# Altium PCB 高级控制盒IJM区组合.PcbDoc
Units mil, origin at the board's own origin, x right, y up, seen from the top; angles counter-clockwise.
Board outline 17086.62 x 944.88 mil, 2 copper layers (Top Layer, Bottom Layer); 8 components, 8 nets, 34 pads, 3 vias.
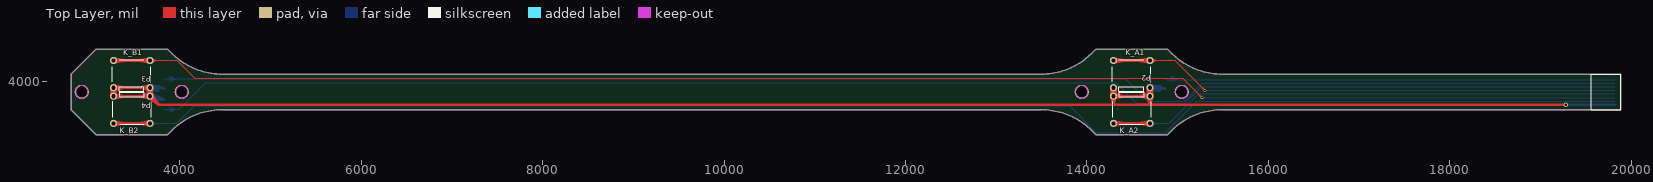
[diagram p0: Top Layer view]
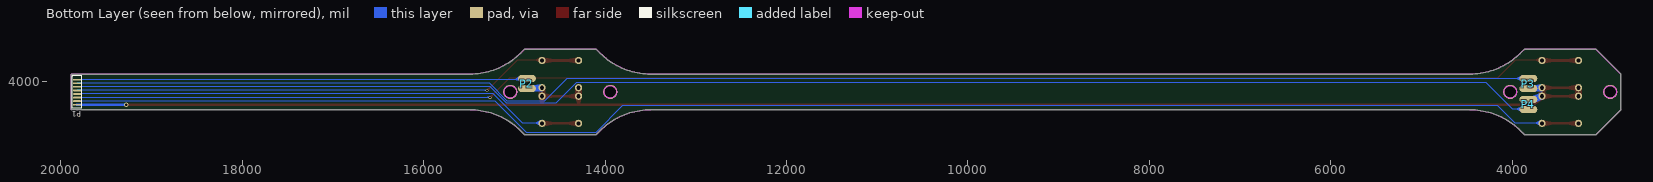
[diagram p1: Bottom Layer view, seen from below]
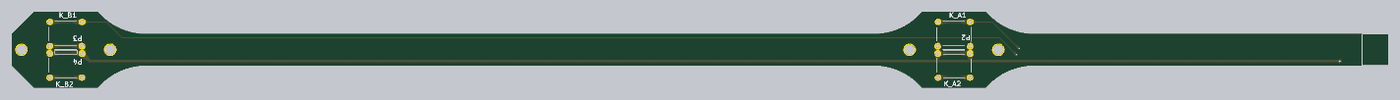
[diagram p2: 3D render of the assembled board from above, using the file's embedded part models]

## Layer stack, top to bottom
Top Layer: signal copper 1.4
Dielectric: dielectric 12.6, FR-4, Dk 4.8
Bottom Layer: signal copper 1.4

## Board outline
3075.38,3410.55 3862.78,3410.55 3907.74,3455.52 cw(c4464.52,2898.74) 4464.52,3686.14 13497.26,3686.14 cw(c13497.26,2898.74) 14054.04,3455.52 14099,3410.55 14886.41,3410.55 14931.37,3455.52 cw(c15488.15,2898.74) 15488.15,3686.14 19886.41,3686.14 19886.41,4079.84 15488.15,4079.84 cw(c15488.15,4867.24) 14931.37,4310.47 14886.41,4355.43 14099,4355.43 14054.04,4310.47 cw(c13497.26,4867.24) 13497.26,4079.84 4464.52,4079.84 cw(c4464.52,4867.24) 3907.74,4310.47 3862.78,4355.43 3075.38,4355.43 2799.78,4079.84 2799.78,3686.14

## Design rules (kind name [scope] priority, off if disabled: settings)
Clearance [All] p1: gap=10
PolygonConnect [All] p1: connectstyle=Relief reliefconductorwidth=10 reliefentries=4 polygonreliefangle="90 Angle"
RoutingVias [All] p1: holewidth=28 width=50 viastyle="Through Hole" minholewidth=28 minwidth=50 maxholewidth=28 maxwidth=50
SilkscreenOverComponentPads [All] p1: minsilkscreentomaskgap=10
SolderMaskExpansion [All] p1: expansion=4
Width [All] p1: maxlimit=50 minlimit=10 preferedwidth=10
27 further rules are at their usual default settings.

## Components (designator, comment, footprint, x,y, rotation, side; value= is the part's Value field where it differs from the comment)
K_A1 "SW4" SW-YKg 14492.7,4079.84 r180 top locked
K_A2 "SW4" SW-YKg 14492.7,3686.14 r0 top locked
K_B1 "SW4" SW-YKg 3469.08,4079.84 r180 top locked
K_B2 "SW4" SW-YKg 3469.08,3686.14 r0 top locked
P1 "Header 8" FFC/SM1.0-8P 19820,3880 r270 bottom
P2 "Header 2" TERMINAL1X2 14860,3920 r90 top
P3 "Header 2" TERMINAL1X2 3820,3920 r90 top
P4 "Header 2" TERMINAL1X2 3820,3800 r270 top

## Footprints (in the part's own frame and the unit in brackets; to place one, negate y for a bottom-side part, rotate by r counter-clockwise, add the part's x,y. Pads: shape width x height; smd on the part's side, far side on the other; paste and mask are expansions set on the pad)
FFC/SM1.0-8P [mil]
  rect 20x90 smd: 1(-137.8,0)
  oval 20x90 smd: 2(-98.43,0) 3(-59.05,0) 4(-19.68,0) 5(19.69,0) 6(59.06,0) 7(98.43,0) 8(137.8,0)
  silkscreen extent -179,-52 179,52
SW-YKg [mil]
  round 80 hole 46: 1(-201.57,150) 1(201.58,150) 2(-201.57,-150) 2(201.57,-150)
  silkscreen extent -210,-158 215,192, body extent -202,-200 211,194, height 395
TERMINAL1X2 [mm]
  oval 2x5 smd far side: 1(2.8,0) 2(0,0)

## Part data
K_A1 K_A2 K_B1 K_B2: library part SW-key
P1: "Header, 8-Pin"
P2 P3 P4: "Header, 2-Pin"

## Free pads (board coordinates)
  round 157.48 hole 125.98: 0(2917.89,3882.99) 0(4020.26,3882.99) 0(13941.52,3882.99) 0(15043.89,3882.99)

## Via types
v1: diameter 30, hole 20, Top Layer to Bottom Layer, tented both sides, 2 vias
v2: diameter 50, hole 28, Top Layer to Bottom Layer, tented both sides, 1 vias

## Nets (pads, with @x,y where several pads share a name; then routed paths per layer and width w, separated by ;. In a path a pad name is that pad's centre, name@x,y a point inside that pad or via, vN(x,y) a via of type N, cw(c..) or ccw(c..) an arc to the next point about the centre after c; other vN are vias at no path point)
KJ_I1: K_A1.2 P1.4 | length 6986.2
  Top Layer w12: K_A1.2@14694.28,4229.84 14969.53,4229.84 v1(15299.68,3899.68) 15255.23,3944.14 ; K_A1.2@14694.94,4219.86 14770.28,4229.84 ; K_A1.2@14694.94,4239.82 14770.28,4229.84 ; K_A1.2@14697.46,4208.07 14770.28,4229.84 ; K_A1.2@14697.46,4251.61 14770.28,4229.84 ; K_A1.2@14701.88,4196.7 14770.28,4229.84 ; K_A1.2@14701.88,4262.98 14770.28,4229.84 ; v1@15292.88,3893.79 15255.23,3944.14 ; v1@15305.58,3906.49 15255.23,3944.14
  Top Layer w30: K_A1.2@14291.13,4229.84 K_A1.2@14694.28,4229.84 ; K_A1.2@14293.53,4204.96 14421.13,4229.84 K_A1.2@14293.53,4254.73 ; K_A1.2@14691.88,4204.96 14564.28,4229.84 K_A1.2@14691.88,4254.73
  Bottom Layer w12: v1(15299.68,3899.68) P1.4 ; v1@15300.42,3890.72 15354.68,3899.68 v1@15300.42,3908.65 ; 19739,3899.68 P1.4@19785,3899.68
KJ_I2: K_A2.2 P1.5 | length 6685.1
  Top Layer w30: K_A2.2@14291.13,3536.14 K_A2.2@14694.28,3536.14 ; K_A2.2@14293.53,3511.26 14421.13,3536.14 K_A2.2@14293.53,3561.03 ; K_A2.2@14691.88,3511.26 14564.28,3536.14 K_A2.2@14691.88,3561.03
  Bottom Layer w12: K_A2.2@14694.28,3536.14 14906.14,3536.14 15093.24,3723.24 15230.31,3860.31 P1.5 ; K_A2.2@14694.94,3526.16 14770.28,3536.14 ; K_A2.2@14694.94,3546.12 14770.28,3536.14 ; K_A2.2@14697.46,3514.37 14770.28,3536.14 ; K_A2.2@14697.46,3557.91 14770.28,3536.14 ; K_A2.2@14701.88,3503 14770.28,3536.14 ; K_A2.2@14701.88,3569.28 14770.28,3536.14 ; 19739,3860.31 P1.5@19785,3860.31
KJ_J1: K_B1.2 P1.6 | length 17980.4
  Top Layer w12: K_B1.2@3670.65,4229.84 3966.32,4229.84 4161.17,4035 13856.61,4035 15053.32,4035 v1(15268.32,3820) ; K_B1.2@3671.31,4219.86 3746.65,4229.84 ; K_B1.2@3671.31,4239.82 3746.65,4229.84 ; K_B1.2@3673.84,4208.07 3746.65,4229.84 ; K_B1.2@3673.84,4251.61 3746.65,4229.84 ; K_B1.2@3678.26,4196.7 3746.65,4229.84 ; K_B1.2@3678.26,4262.98 3746.65,4229.84 ; v1@15261.51,3814.11 15223.86,3864.46 v1@15274.21,3826.8
  Top Layer w30: K_B1.2@3267.5,4229.84 K_B1.2@3670.65,4229.84 ; K_B1.2@3269.9,4204.96 3397.5,4229.84 K_B1.2@3269.9,4254.73 ; K_B1.2@3668.25,4204.96 3540.65,4229.84 K_B1.2@3668.25,4254.73
  Bottom Layer w12: v1(15268.32,3820) 19786.66,3820 19787.6,3820.94 P1.6 ; v1@15269.05,3811.03 15323.32,3820 v1@15269.05,3828.97 ; 19738.96,3820 P1.6@19785,3820.94
KJ_J2: K_B2.2 P1.7 | length 17920.5
  Top Layer w30: K_B2.2@3267.5,3536.14 K_B2.2@3670.65,3536.14 ; K_B2.2@3269.9,3511.26 3397.5,3536.14 K_B2.2@3269.9,3561.03 ; K_B2.2@3668.25,3511.26 3540.65,3536.14 K_B2.2@3668.25,3561.03
  Bottom Layer w12: K_B2.2@3670.65,3536.14 3966.32,3536.14 4160.18,3730 13807.09,3730 14102.09,3435 14865,3435 15211.57,3781.57 P1.7 ; K_B2.2@3671.31,3526.16 3746.65,3536.14 ; K_B2.2@3671.31,3546.12 3746.65,3536.14 ; K_B2.2@3673.84,3514.37 3746.65,3536.14 ; K_B2.2@3673.84,3557.91 3746.65,3536.14 ; K_B2.2@3678.26,3503 3746.65,3536.14 ; K_B2.2@3678.26,3569.28 3746.65,3536.14 ; 19739,3781.57 P1.7@19785,3781.57
KJ_M2: P1.1 P2.1 | length 5551.8
  Bottom Layer w12: P2.1 14872.44,4017.8 P1.1 ; P2.1@14918.11,4020.91 14995.29,4017.8 ; P2.1@14918.56,4008.87 14995.29,4017.8 ; P2.1@14919.06,4030.24 14995.29,4017.8 ; P2.1@14920.92,3996.92 14995.29,4017.8 ; P2.1@14921.12,4039.38 14995.29,4017.8 ; P2.1@14925.38,4050.65 14995.29,4017.8 ; P2.1@14931.42,4061.23 14995.29,4017.8 ; 19739,4017.8 P1.1@19785,4017.8
KJ_M3: P1.2 P3.1 | length 16759.3
  Bottom Layer w12: P3.1 14420.99,4030.24 14671.08,3780.14 15075.02,3780.14 15273.3,3978.43 P1.2 ; P3.1@3879.06,4030.24 3954.43,4030.24 ; P3.1@3879.64,4020.88 3954.43,4030.24 ; P3.1@3879.64,4039.59 3954.43,4030.24 ; P3.1@3882.08,4009.08 3954.43,4030.24 ; P3.1@3882.08,4051.39 3954.43,4030.24 ; P3.1@3886.44,3997.69 3954.43,4030.24 ; P3.1@3886.44,4062.78 3954.43,4030.24 ; 19739,3978.43 P1.2@19785,3978.43
KJ_M4: P1.3 P4.1 | length 16865.5
  Bottom Layer w12: P4.1 3989.76,3689.76 4285.84,3985.84 14314.32,3985.84 14542.03,3758.14 15084.13,3758.14 15265.04,3939.05 P1.3 ; P4.1@3879.06,3689.76 3954.43,3689.76 ; P4.1@3879.64,3680.41 3954.43,3689.76 ; P4.1@3879.64,3699.12 3954.43,3689.76 ; P4.1@3882.08,3668.61 3954.43,3689.76 ; P4.1@3882.08,3710.92 3954.43,3689.76 ; P4.1@3886.44,3657.22 3954.43,3689.76 ; P4.1@3886.44,3722.31 3954.43,3689.76 ; 19739,3939.05 P1.3@19785,3939.05
SGND: K_A1.1 K_A2.1 K_B1.1 K_B2.1 P1.8 P2.2 P3.2 P4.2 | length 31967.5
  Top Layer w30: K_B2.1@3242.72,3832.81 K_B1.1@3242.72,3926.51 ; K_B2.1@3242.72,3839.48 K_B1.1@3267.5,3929.84 ; K_B2.1@3244.49,3845.91 K_B1.1@3292.28,3926.51 ; K_B2.1@3269.9,3811.26 3397.5,3836.14 K_B2.1@3269.9,3861.03 ; K_B1.1@3269.9,3904.96 3397.5,3929.84 K_B1.1@3269.9,3954.73 ; K_B2.1@3290.51,3845.91 K_B1.1@3242.72,3926.51 ; K_B2.1@3292.28,3832.81 K_B1.1@3292.28,3926.51 ; K_B2.1@3292.28,3839.48 K_B1.1@3267.5,3929.84 ; K_B2.1@3645.87,3832.81 K_B1.1@3645.87,3926.51 ; K_B2.1@3645.87,3839.48 K_B1.1@3670.65,3929.84 ; K_B2.1@3647.64,3845.91 K_B1.1@3695.43,3926.51 ; K_B2.1@3654.67,3816.91 3766.79,3740 ; K_B2.1@3668.25,3811.26 3540.65,3836.14 K_B2.1@3668.25,3861.03 ; K_B1.1@3668.25,3904.96 3540.65,3929.84 K_B1.1@3668.25,3954.73 ; K_B2.1@3689.88,3852.12 3766.79,3740 ; K_B2.1@3693.66,3845.91 K_B1.1@3645.87,3926.51 ; K_B2.1@3695.43,3832.81 K_B1.1@3695.43,3926.51 ; K_B2.1@3695.43,3839.48 K_B1.1@3670.65,3929.84 ; 14245.75,3740 14291.13,3740 ; K_A2.1@14266.34,3832.89 14291.13,3740 ; K_A2.1@14268.09,3845.84 K_A1.1@14316.01,3927.44 ; K_A2.1@14268.12,3845.91 K_A1.1@14315.91,3926.51 ; K_A2.1@14293.53,3811.26 14421.13,3836.14 K_A2.1@14293.53,3861.03 ; K_A2.1@14314.17,3845.84 K_A1.1@14266.24,3927.44 ; K_A2.1@14314.14,3845.91 K_A1.1@14266.35,3926.51 ; K_A2.1@14315.92,3832.89 14291.13,3740 ; K_A2.1@14669.49,3832.89 14694.28,3740 ; K_A2.1@14671.24,3845.84 K_A1.1@14719.16,3927.44 ; K_A2.1@14671.27,3845.91 K_A1.1@14719.06,3926.51 ; K_A2.1@14691.88,3811.26 14564.28,3836.14 K_A2.1@14691.88,3861.03 ; K_A2.1@14717.32,3845.84 K_A1.1@14669.39,3927.44 ; K_A2.1@14717.29,3845.91 K_A1.1@14669.5,3926.51 ; K_A2.1@14719.07,3832.89 14694.28,3740 ; v2(19280,3740) 14694.28,3740 ; K_B1.1@3242.72,3926.51 K_B2.1@3267.5,3836.14 ; K_B1.1@3242.72,3926.51 K_B2.1@3267.5,3836.14 ; K_B2.1@3267.5,3836.14 K_B2.1@3670.65,3836.14 ; K_B2.1@3267.5,3836.14 K_B1.1@3267.5,3929.84 ; K_B2.1@3267.5,3836.14 K_B1.1@3292.28,3926.51 ; K_B2.1@3267.5,3836.14 K_B1.1@3267.5,3929.84 ; K_B2.1@3267.5,3836.14 K_B1.1@3292.28,3926.51 ; K_B1.1@3267.5,3929.84 K_B1.1@3670.65,3929.84 ; K_B1.1@3645.87,3926.51 K_B2.1@3670.65,3836.14 ; K_B1.1@3645.87,3926.51 K_B2.1@3670.65,3836.14 ; K_B2.1@3670.65,3836.14 3766.79,3740 ; K_B2.1@3670.65,3836.14 K_B1.1@3670.65,3929.84 ; K_B2.1@3670.65,3836.14 K_B1.1@3695.43,3926.51 ; K_B2.1@3670.65,3836.14 K_B1.1@3670.65,3929.84 ; K_B2.1@3670.65,3836.14 K_B1.1@3695.43,3926.51 ; 3766.79,3740 14291.13,3740 ; K_A1.1@14266.24,3927.44 14291.13,3799.84 K_A1.1@14316.01,3927.44 ; K_A1.1@14266.24,3927.44 14266.35,3832.81 K_A1.1@14266.35,3926.51 ; K_A1.1@14266.24,3927.44 K_A2.1@14291.13,3836.14 ; K_A2.1@14266.35,3839.48 K_A1.1@14291.13,3929.84 ; K_A2.1@14266.35,3839.48 K_A1.1@14291.13,3929.84 ; K_A2.1@14266.35,3839.48 K_A1.1@14291.13,3929.84 ; K_A1.1@14266.35,3926.51 K_A2.1@14291.13,3836.14 ; 14291.13,3740 K_A1.1@14291.13,3929.84 ; 14291.13,3740 14694.28,3740 ; K_A2.1@14291.13,3836.14 K_A1.1@14291.13,3929.84 ; K_A2.1@14291.13,3836.14 K_A2.1@14694.28,3836.14 ; K_A2.1@14291.13,3836.14 K_A1.1@14315.91,3926.51 ; K_A2.1@14291.13,3836.14 K_A1.1@14291.13,3929.84 ; K_A2.1@14291.13,3836.14 K_A1.1@14316.01,3927.44 ; K_A1.1@14291.13,3929.84 K_A2.1@14315.91,3839.48 ; K_A1.1@14291.13,3929.84 K_A2.1@14315.91,3839.48 ; K_A1.1@14291.13,3929.84 K_A2.1@14315.91,3839.48 ; K_A1.1@14315.91,3926.51 14315.91,3832.81 K_A1.1@14316.01,3927.44 ; K_A1.1@14669.39,3927.44 14694.28,3799.84 K_A1.1@14719.16,3927.44 ; K_A1.1@14669.39,3927.44 14669.5,3832.81 K_A1.1@14669.5,3926.51 ; K_A1.1@14669.39,3927.44 K_A2.1@14694.28,3836.14 ; K_A2.1@14669.5,3839.48 K_A1.1@14694.28,3929.84 ; K_A2.1@14669.5,3839.48 K_A1.1@14694.28,3929.84 ; K_A2.1@14669.5,3839.48 K_A1.1@14694.28,3929.84 ; K_A1.1@14669.5,3926.51 K_A2.1@14694.28,3836.14 ; 14694.28,3740 K_A1.1@14694.28,3929.84 ; K_A2.1@14694.28,3836.14 K_A1.1@14694.28,3929.84 ; K_A2.1@14694.28,3836.14 K_A1.1@14719.06,3926.51 ; K_A2.1@14694.28,3836.14 K_A1.1@14694.28,3929.84 ; K_A2.1@14694.28,3836.14 K_A1.1@14719.16,3927.44 ; K_A1.1@14694.28,3929.84 K_A2.1@14719.06,3839.48 ; K_A1.1@14694.28,3929.84 K_A2.1@14719.06,3839.48 ; K_A1.1@14694.28,3929.84 K_A2.1@14719.06,3839.48 ; K_A1.1@14719.06,3926.51 14719.06,3832.81 K_A1.1@14719.16,3927.44
  Bottom Layer w30: P4.2@3744.37,3782.13 K_B2.1@3678.49,3859.88 ; P3.2@3749.14,3898.68 K_B1.1@3673.05,3954.73 ; P3.2@3753.59,3943.23 K_B1.1@3673.05,3904.96 ; P4.2@3754.92,3776.39 K_B2.1@3666.77,3811.44 ; P3.2@3755.08,3896.35 K_B1.1@3670.65,3929.84 ; P3.2@3760.31,3944.36 K_B1.1@3670.65,3929.84 ; P4.2@3760.75,3824.37 K_B2.1@3666.77,3811.44 ; P3.2@3761.74,3895.64 K_B1.1@3673.05,3904.96 ; P3.2@3766.9,3943.63 K_B1.1@3673.05,3954.73 ; P4.2@3772.8,3821.29 K_B2.1@3678.49,3859.88 ; P3.2 3810.16,3929.84 K_B1.1@3670.65,3929.84 ; P2.2@14790.62,3897.93 K_A1.1@14698.52,3954.48 ; P2.2@14794.78,3943.58 K_A1.1@14694.79,3904.85 ; P2.2@14795.96,3896.15 K_A1.1@14694.28,3929.84 ; P2.2@14797.88,3895.82 K_A1.1@14704.12,3920 ; P2.2@14797.88,3944.18 K_A1.1@14704.12,3920 ; P2.2@14800.41,3944.36 K_A1.1@14694.28,3929.84 ; P2.2@14801.62,3895.64 K_A1.1@14694.79,3904.85 ; P2.2@14806.07,3943.83 K_A1.1@14698.52,3954.48 ; P2.2 K_A1.1@14704.12,3920 ; v2(19280,3740) 19399.08,3742.2 ; v2@19282.2,3742.2 P1.8 ; 19685,3742.2 P1.8@19785,3742.2 ; K_B2.1@3666.77,3811.44 P4.2 ; K_B2.1@3666.77,3811.44 P4.2@3760.94,3800 ; K_B2.1@3670.65,3836.14 3706.79,3800 ; K_B2.1@3670.65,3836.14 P4.2 ; K_B2.1@3670.65,3836.14 3749.13,3778.69 K_B2.1@3670.65,3836.14 ; K_B2.1@3670.65,3836.14 3767.09,3823.58 K_B2.1@3670.65,3836.14 ; K_B2.1@3670.65,3836.14 P4.2@3760.94,3800 ; K_B2.1@3670.65,3836.14 P4.2@3760.94,3800 ; K_B1.1@3670.65,3929.84 P3.2@3760.94,3920 ; K_B1.1@3673.05,3904.96 3800.65,3929.84 K_B1.1@3673.05,3954.73 ; K_B1.1@3673.05,3904.96 P3.2@3760.94,3920 ; K_B1.1@3673.05,3954.73 P3.2@3760.94,3920 ; K_B2.1@3678.49,3859.88 P4.2 ; K_B2.1@3678.49,3859.88 P4.2@3760.94,3800 ; 3706.79,3800 P4.2 ; 3706.79,3800 3755.46,3776.25 3706.79,3800 ; 3706.79,3800 3755.46,3823.74 3706.79,3800 ; 3706.79,3800 P4.2@3760.94,3800 ; 3706.79,3800 P4.2@3760.94,3800 ; K_A1.1@14694.28,3929.84 K_A1.1@14704.12,3920 ; K_A1.1@14694.28,3929.84 P2.2@14825.19,3920 ; K_A1.1@14694.28,3929.84 P2.2@14800.94,3920 ; K_A1.1@14694.79,3904.85 P2.2@14825.19,3920 ; K_A1.1@14694.79,3904.85 P2.2@14800.94,3920 ; K_A1.1@14698.52,3954.48 P2.2@14825.19,3920 ; K_A1.1@14698.52,3954.48 P2.2@14800.94,3920 ; K_A1.1@14704.12,3920 P2.2@14800.94,3920

## Keep-outs
Keep-Out Layer:
  circle w5: c2917.89,3882.99 r68.9
  circle w5: c4020.26,3882.99 r68.9
  circle w5: c13941.52,3882.99 r68.9
  circle w5: c15043.89,3882.99 r68.9
  lines w5: 2799.78,3686.14 3075.38,3410.55 3862.78,3410.55 3907.74,3455.52 cw(c4464.52,2898.74) 4464.52,3686.14 13497.26,3686.14 cw(c13497.26,2898.74) 14054.04,3455.52 14099,3410.55 14886.41,3410.55 14931.37,3455.52 cw(c15488.15,2898.74) 15488.15,3686.14 19886.41,3686.14 19886.41,4079.84 15488.15,4079.84 cw(c15488.15,4867.24) 14931.37,4310.47 14886.41,4355.43 14099,4355.43 14054.04,4310.47 cw(c13497.26,4867.24) 13497.26,4079.84 4464.52,4079.84 cw(c4464.52,4867.24) 3907.74,4310.47 3862.78,4355.43 3075.38,4355.43 2799.78,4079.84 2799.78,3686.14

## Silkscreen, mask and mechanical layers (free items; w line width, h text height)
Top Overlay:
  lines w5.91: 19560,3685 19561.14,3686.14 19886.41,3686.14 19886.41,4079.84 19560,4079.84 19560,3691.14 19560,3685